# EAGLE board cryobondr-qbit2-pqc (EAGLE 6.1)
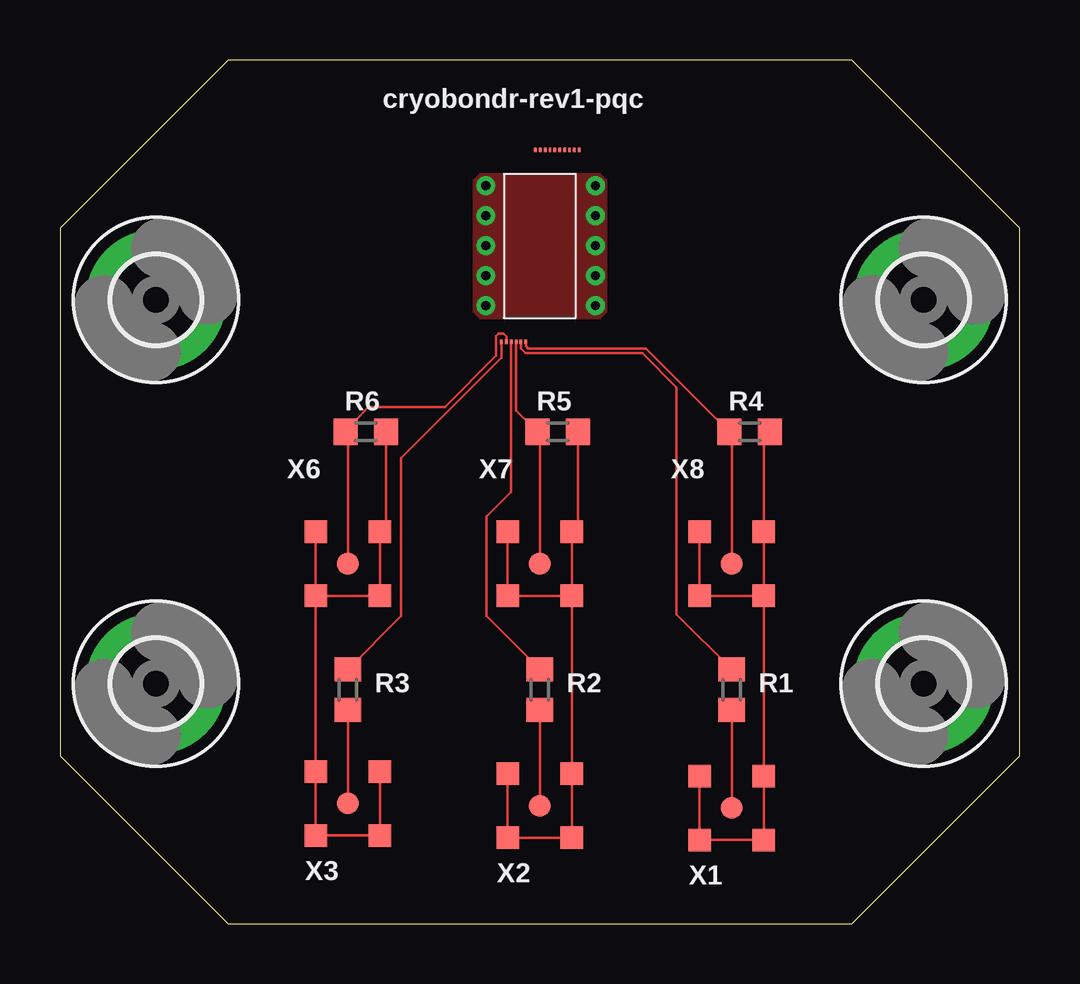
[diagram p0: board, top side]
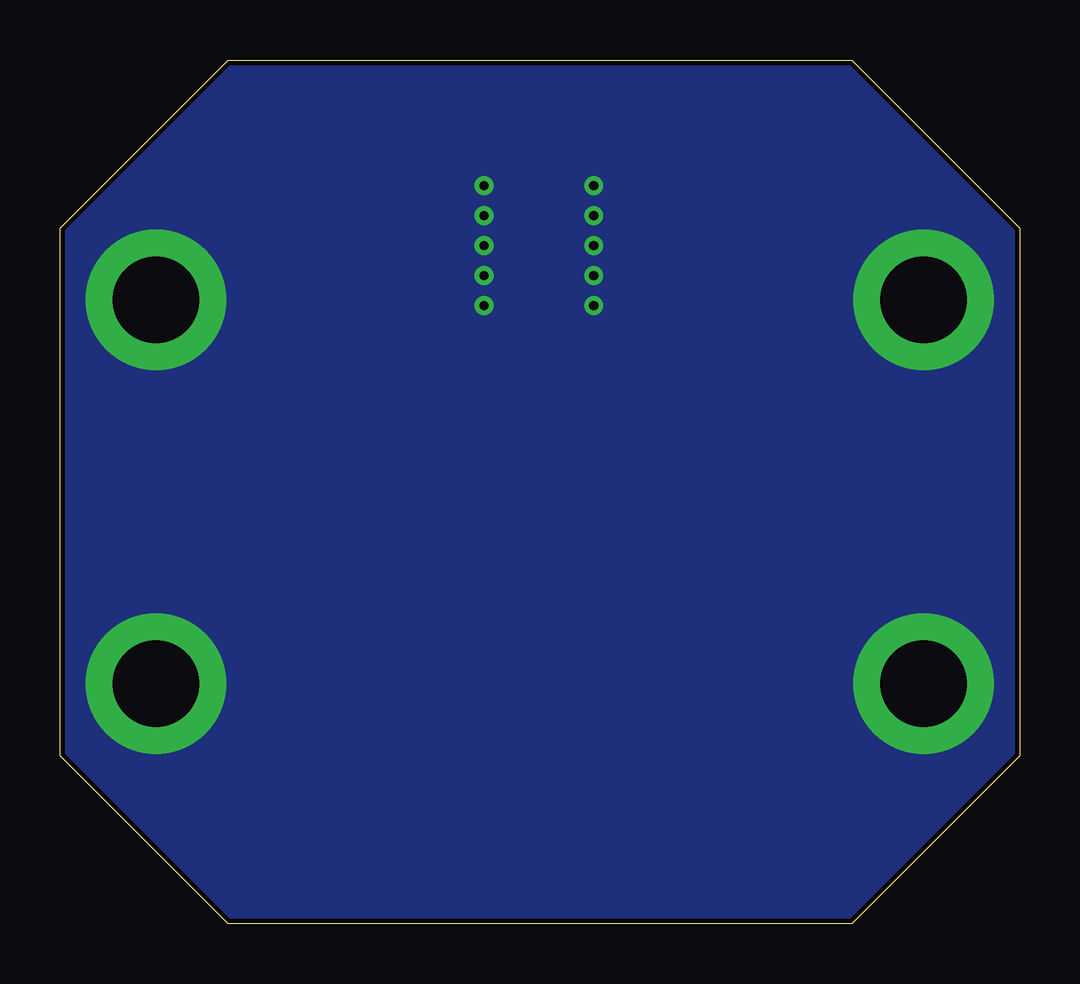
[diagram p1: board, bottom side, seen from below]

Size 40 x 36 mm. Coordinates in mm from the lower left corner, seen from the top.
Outline: 7,0 33,0 40,7 40,29 33,36 7,36 0,29 0,7 7,0
Copper layers (1*16): Top 0.035mm / dielectric 1.5mm / Bottom 0.035mm
Design rules: minimum track width 4mil, minimum drill 15mil, track to track 4mil, track to pad 4mil, pad to pad 4mil, via to via 4mil, smd to smd 4mil, copper to edge 8mil, drill to drill 8mil, minimum pad ring 10mil, minimum via ring 8mil, stop-mask expansion 4mil, vias tented up to drill 0mil, thermal gap 10mil

## Footprints (pad centres in the part's own frame; a part is rotated, then mirrored left to right if it is on the bottom)
3,6-PAD = drill 3.6 pad 5.842: B3,6 0,0
QBIT2-WIREBOND-CRYO1 = smd 0.102 x 0.203: D1-N-CATHODE 0.02,4; D1-P-ANODE -0.183,4; D2-N-CATHODE 0.223,4; D2-P-ANODE 0.426,4; D3-N-CATHODE 0.63,4; D3-P-ANODE 1.239,4; D4-N-CATHODE 0.833,4; D4-P-ANODE 1.036,4; D5-N-CATHODE 1.442,4; D5-P-ANODE 1.646,4; D6-N-CATHODE -1.598,-4; D6-P-ANODE -1.394,-4; D7-N-CATHODE -1.191,-4; D7-P-ANODE -0.988,-4; D8-N-CATHODE -0.785,-4; D8-P-ANODE -0.582,-4
R0603 = smd 1 x 1.1: 1 -0.85,0; 2 0.85,0
MMCX-SMT = smd 0.94 x 0.94: G1 -1.333,1.333; G2 1.333,1.333; G3 1.333,-1.333; G4 -1.333,-1.333 | smd 0.889 x 0.889: S 0,0

## Placement (x,y rotation side)
H1  MOUNT-PAD-ROUND3.6  [3,6-PAD]  36,10 0 top
H2  MOUNT-PAD-ROUND3.6  [3,6-PAD]  4,10 0 top
H3  MOUNT-PAD-ROUND3.6  [3,6-PAD]  36,26 0 top
H4  MOUNT-PAD-ROUND3.6  [3,6-PAD]  4,26 0 top
IC1  QBIT2-WIREBOND-CRYO1  [QBIT2-WIREBOND-CRYO1]  20,28.25 0 top
R1  68k  [R0603]  28,9.75 90 top
R2  68k  [R0603]  20,9.75 90 top
R3  68k  [R0603]  12,9.75 90 top
R4  DNP  [R0603]  28.75,20.5 0 top
R5  DNP  [R0603]  20.75,20.5 0 top
R6  DNP  [R0603]  12.75,20.5 0 top
X1  D8_BIAS  [MMCX-SMT]  28,4.82 0 top
X2  D7_BIAS  [MMCX-SMT]  20,4.91 0 top
X3  D6_BIAS  [MMCX-SMT]  12,5 0 top
X6  D6_SENSE  [MMCX-SMT]  12,15 0 top
X7  D7_SENSE  [MMCX-SMT]  20,15 0 top
X8  D8_SENSE  [MMCX-SMT]  28,15 0 top

## Library data of the parts
H1-H4 = holes
IC1 X1-X3 X6-X8 = meng
R1-R6 = resistor

## Nets
D6-N-CATHODE: IC1.D6-N-CATHODE R3.2
D6-P-ANODE: IC1.D6-P-ANODE R6.1 X6.S
D6_BIAS: R3.1 X3.S
D6_BIAS_RET: R6.2 X3.G1 X3.G2 X3.G3 X3.G4 X6.G1 X6.G2 X6.G3 X6.G4
D7-N-CATHODE: IC1.D7-N-CATHODE R2.2
D7-P-ANODE: IC1.D7-P-ANODE R5.1 X7.S
D7_BIAS: R2.1 X2.S
D7_BIAS_RET: R5.2 X2.G1 X2.G2 X2.G3 X2.G4 X7.G1 X7.G2 X7.G3 X7.G4
D8-N-CATHODE: IC1.D8-N-CATHODE R1.2
D8-P-ANODE: IC1.D8-P-ANODE R4.1 X8.S
D8_BIAS: R1.1 X1.S
D8_BIAS_RET: R4.2 X1.G1 X1.G2 X1.G3 X1.G4 X8.G1 X8.G2 X8.G3 X8.G4
GND: H1.B3,6 H2.B3,6 H3.B3,6 H4.B3,6
NC_D1-N-CATHODE: IC1.D1-N-CATHODE
NC_D1-P-ANODE: IC1.D1-P-ANODE
NC_D2-N-CATHODE: IC1.D2-N-CATHODE
NC_D2-P-ANODE: IC1.D2-P-ANODE
NC_D3-N-CATHODE: IC1.D3-N-CATHODE
NC_D3-P-ANODE: IC1.D3-P-ANODE
NC_D4-N-CATHODE: IC1.D4-N-CATHODE
NC_D4-P-ANODE: IC1.D4-P-ANODE
NC_D5-N-CATHODE: IC1.D5-N-CATHODE
NC_D5-P-ANODE: IC1.D5-P-ANODE

## Tracks (layer width: path | path; a pad name or v marks a point on that pad's centre or on a via)
D6-N-CATHODE
  Top 0.102: IC1.D6-N-CATHODE 18.4,23.58 14.22,19.41 14.22,12.82 R3.2
D6-P-ANODE
  Top 0.102: IC1.D6-P-ANODE 18.61,24.47 18.49,24.59 18.29,24.59 18.19,24.49 18.19,23.67 16.05,21.54 12.84,21.54 R6.1 12,20.4 X6.S
D6_BIAS
  Top 0.102: X3.S R3.1
D6_BIAS_RET
  Top 0.102: X6.G1 X6.G4 | X6.G4 X6.G3 X6.G2 13.6,16.6 R6.2 | X6.G4 X3.G1 X3.G4 X3.G3 X3.G2
D7-N-CATHODE
  Top 0.102: IC1.D7-N-CATHODE 18.81,18 17.78,16.97 17.78,12.82 R2.2
D7-P-ANODE
  Top 0.102: X7.S 20,20.4 R5.1 19.01,21.39 IC1.D7-P-ANODE
D7_BIAS
  Top 0.102: R2.1 X2.S
D7_BIAS_RET
  Top 0.102: X7.G1 X7.G4 X7.G3 | X7.G3 X7.G2 21.6,16.6 R5.2 | X7.G3 X2.G2 X2.G3 X2.G4 X2.G1
D8-N-CATHODE
  Top 0.102: IC1.D8-N-CATHODE 19.21,23.96 19.41,23.77 24.28,23.77 25.7,22.35 25.7,12.89 R1.2
D8-P-ANODE
  Top 0.102: IC1.D8-P-ANODE 19.42,24.07 19.51,23.98 24.42,23.98 R4.1 28,20.4 X8.S
D8_BIAS
  Top 0.102: R1.1 X1.S
D8_BIAS_RET
  Top 0.102: X1.G1 X1.G4 X1.G3 X1.G2 X8.G3 | X8.G3 X8.G4 X8.G1 | X8.G3 X8.G2 29.33,20.23 R4.2
GND  (via drill 0.38)
  other vias: 17.75,30.76 17.75,29.51 17.75,28.26 17.75,27.01 17.75,25.76 22.32,30.76 22.32,29.51 22.32,28.26 22.32,27.01 22.32,25.76
  pour Bottom (no thermals): 0,0 40,0 40,36 0,36
  pour Top: 17.25,25.5 17.5,25.25 22.5,25.25 22.75,25.5 22.75,31 22.5,31.25 17.5,31.25 17.25,31

## Text on the board
tPlace: cryobondr-rev1-pqc